# EAGLE board Kosmos-X3000-VHF-Superregen (EAGLE 7.6.0)
Kosmos X3000 FM Super Regen http://www.edaboard.com/thread140764-4.html#post1374216
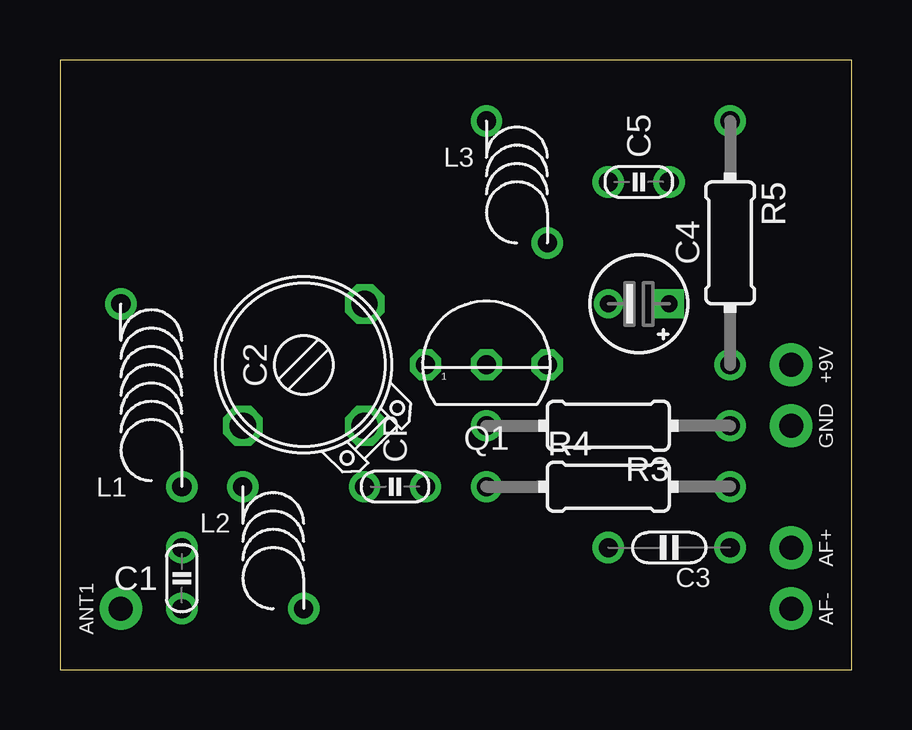
[diagram p0: board, top side]
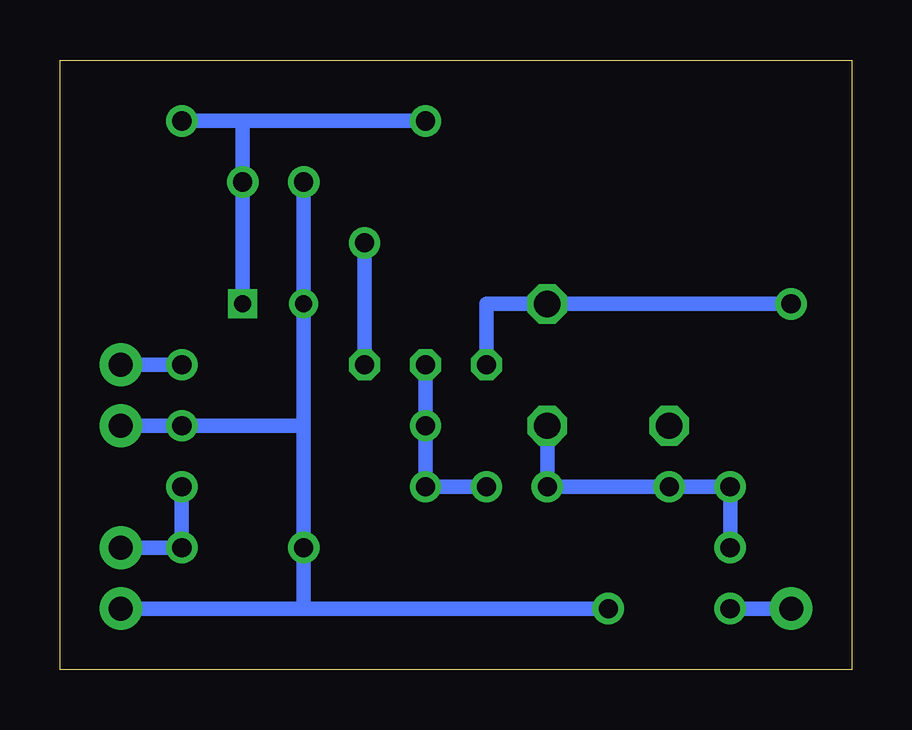
[diagram p1: board, bottom side, seen from below]

Size 33.02 x 25.4 mm. Coordinates in mm from the lower left corner, seen from the top.
Outline: 0,0 33.02,0 33.02,25.4 0,25.4 0,0
Copper layers (1*16): Top 0.035mm / dielectric 1.5mm / Bottom 0.035mm
Design rules "default": minimum track width 10mil, minimum drill 24mil, track to track 8mil, track to pad 8mil, pad to pad 8mil, via to via 8mil, smd to smd 8mil, copper to edge 40mil, drill to drill 8mil, minimum pad ring 10mil, minimum via ring 8mil, stop-mask expansion 4mil, vias tented up to drill 0mil, thermal gap 10mil
Net classes: 0 default: width 0.61 mm

## Footprints (pad centres in the part's own frame; a part is rotated, then mirrored left to right if it is on the bottom)
SPAD = drill 1 pad 1.778: 1 0,0
C025-015X024 = drill 0.8: 1 0,1.27; 2 0,-1.27
TRIM-2222-808 = drill 1.1 octagon: 1 -2.54,2.54; 2 -2.54,-2.54; 3 2.54,-2.54
C050-020X036 = drill 0.8: 1 -2.54,0; 2 2.54,0
E2.5-4/V = drill 0.7 square: + 0,1.27 | drill 0.7: - 0,-1.27
L-04/7V = drill 0.8: 1 1.27,-5.08; 2 -1.27,2.54
L-04-5/5V = drill 0.8: 1 -1.27,2.54; 2 1.27,-2.54
TO92 = drill 0.8 octagon: 1 -2.54,0; 2 0,0; 3 2.54,0
0204/10 = drill 0.8: 1 -5.08,0; 2 5.08,0

## Placement (x,y rotation side)
+9V  SPAD  [SPAD]  30.48,12.7 180 top
AF+  SPAD  [SPAD]  30.48,5.08 180 top
AF-  SPAD  [SPAD]  30.48,2.54 180 top
ANT1  ANT  [SPAD]  2.54,2.54 0 top
C1  15p  [C025-015X024]  5.08,3.81 0 top
C2  15p  [TRIM-2222-808]  10.16,12.7 90 top
C3  6.8n  [C050-020X036]  25.4,5.08 180 top
C4  100u  [E2.5-4/V]  24.13,15.24 270 top
C5  100n  [C025-015X024]  24.13,20.32 270 top
CP  4.7n  [C025-015X024]  13.97,7.62 270 top
GND  SPAD  [SPAD]  30.48,10.16 180 top
L1  L04/7  [L-04/7V]  3.81,12.7 0 top
L2  [L-04-5/5V]  8.89,5.08 0 top
L3  4 turns  [L-04-5/5V]  19.05,20.32 0 top
Q1  BF256B  [TO92]  17.78,12.7 0 top
R3  3.3k  [0204/10]  22.86,10.16 180 top
R4  10k  [0204/10]  22.86,7.62 0 top
R5  150  [0204/10]  27.94,17.78 270 top

## Library data of the parts
+9V AF+ AF- ANT1 GND = pad
C1 C3-C5 CP = c
C2 = cap-trim
L1-L3 = l
Q1 = t
R3-R5 = r

## Nets
GND: AF-.1 C3.2 C4.- C5.2 GND.1 L2.2 R3.1
N$1: CP.1 Q1.2 R3.2 R4.1
N$2: AF+.1 C3.1 R4.2
N$3: ANT1.1 C1.2
N$4: C4.+ C5.1 L3.1 R5.1
N$5: C2.3 L1.2 Q1.1
N$6: C1.1 C2.2 CP.2 L1.1 L2.1
N$7: L3.2 Q1.3
N$8: +9V.1 R5.2

## Tracks (layer width: path | path; a pad name or v marks a point on that pad's centre or on a via)
GND
  Bottom 0.61: C4.- C5.2 22.86,10.16 | AF-.1 22.86,2.54 | 22.86,2.54 C3.2 22.86,10.16 | 22.86,10.16 R3.1 GND.1 | 22.86,2.54 L2.2
N$1
  Bottom 0.61: CP.1 R4.1 R3.2 Q1.2
N$2
  Bottom 0.61: R4.2 C3.1 AF+.1
N$3
  Bottom 0.61: ANT1.1 C1.2
N$4
  Bottom 0.61: C4.+ C5.1 25.4,22.86 | 25.4,22.86 R5.1 | 25.4,22.86 L3.1
N$5
  Bottom 0.61: L1.2 C2.3 15.24,15.24 Q1.1
N$6
  Bottom 0.61: C2.2 CP.2 L2.1 L1.1 C1.1
N$7
  Bottom 0.61: Q1.3 L3.2
N$8
  Bottom 0.61: +9V.1 R5.2